# Altium PCB Barun Gas Control V2a.PcbDoc
Units mil, origin at the board's own origin, x right, y up, seen from the top; angles counter-clockwise.
Board outline 3937.01 x 2165.35 mil, 2 copper layers (Top Layer, Bottom Layer); 36 components, 30 nets, 123 pads, 0 vias.
Unrouted connection lines stored in the file: 1.
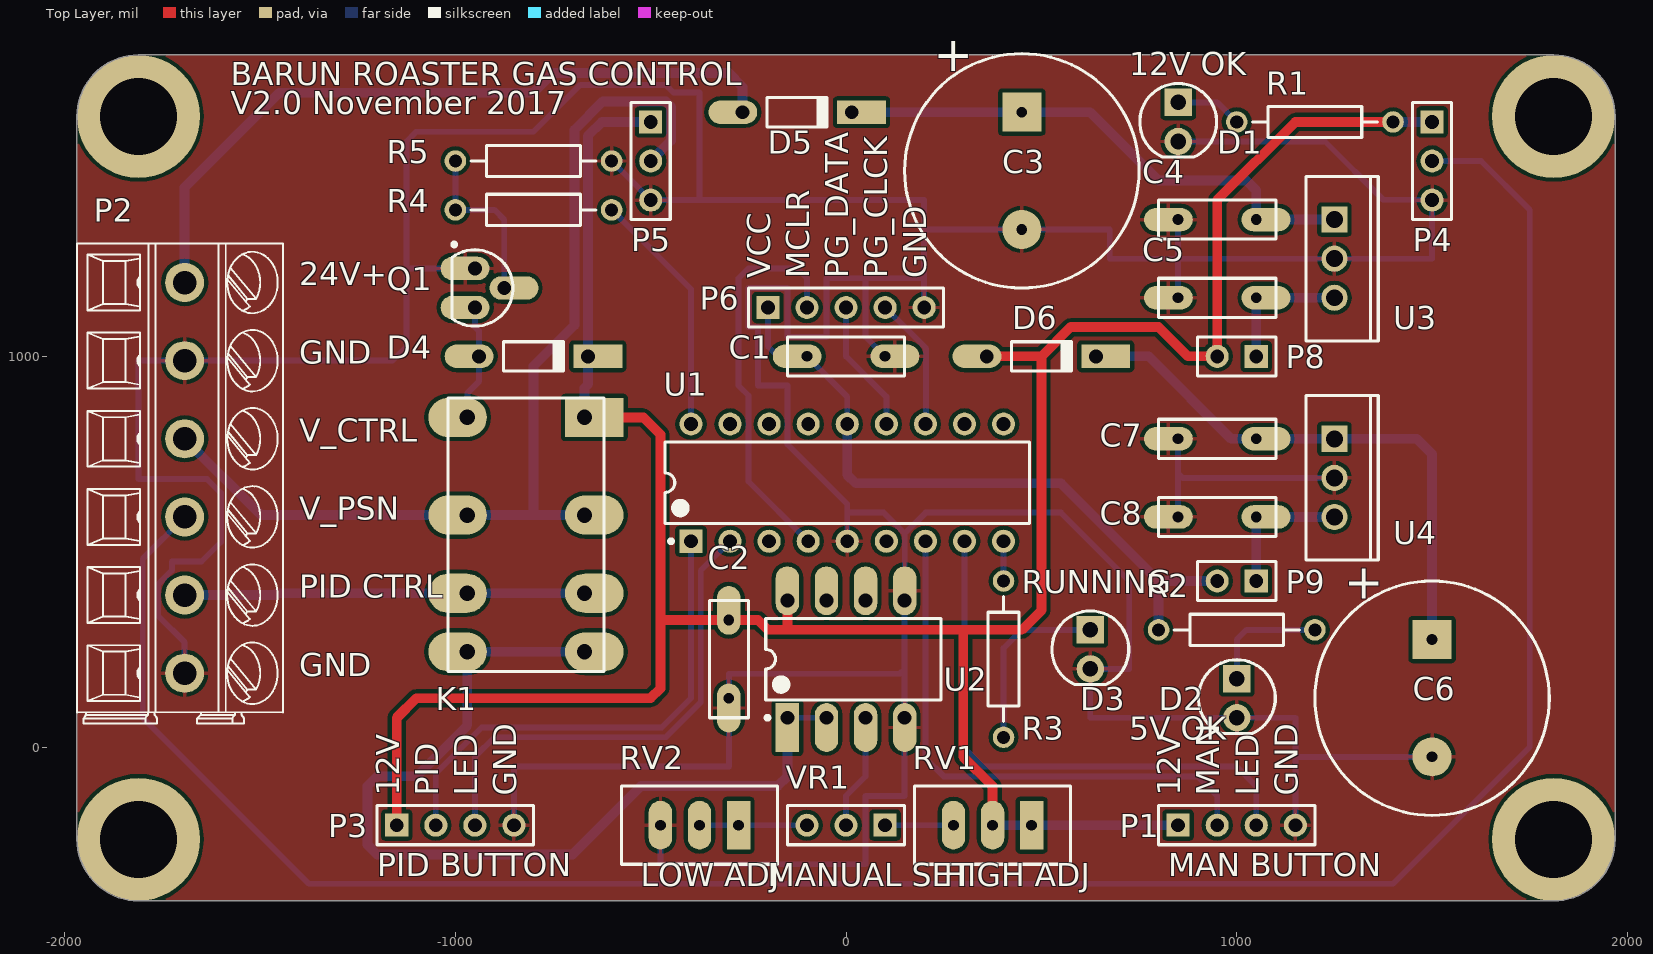
[diagram p0: Top Layer view]
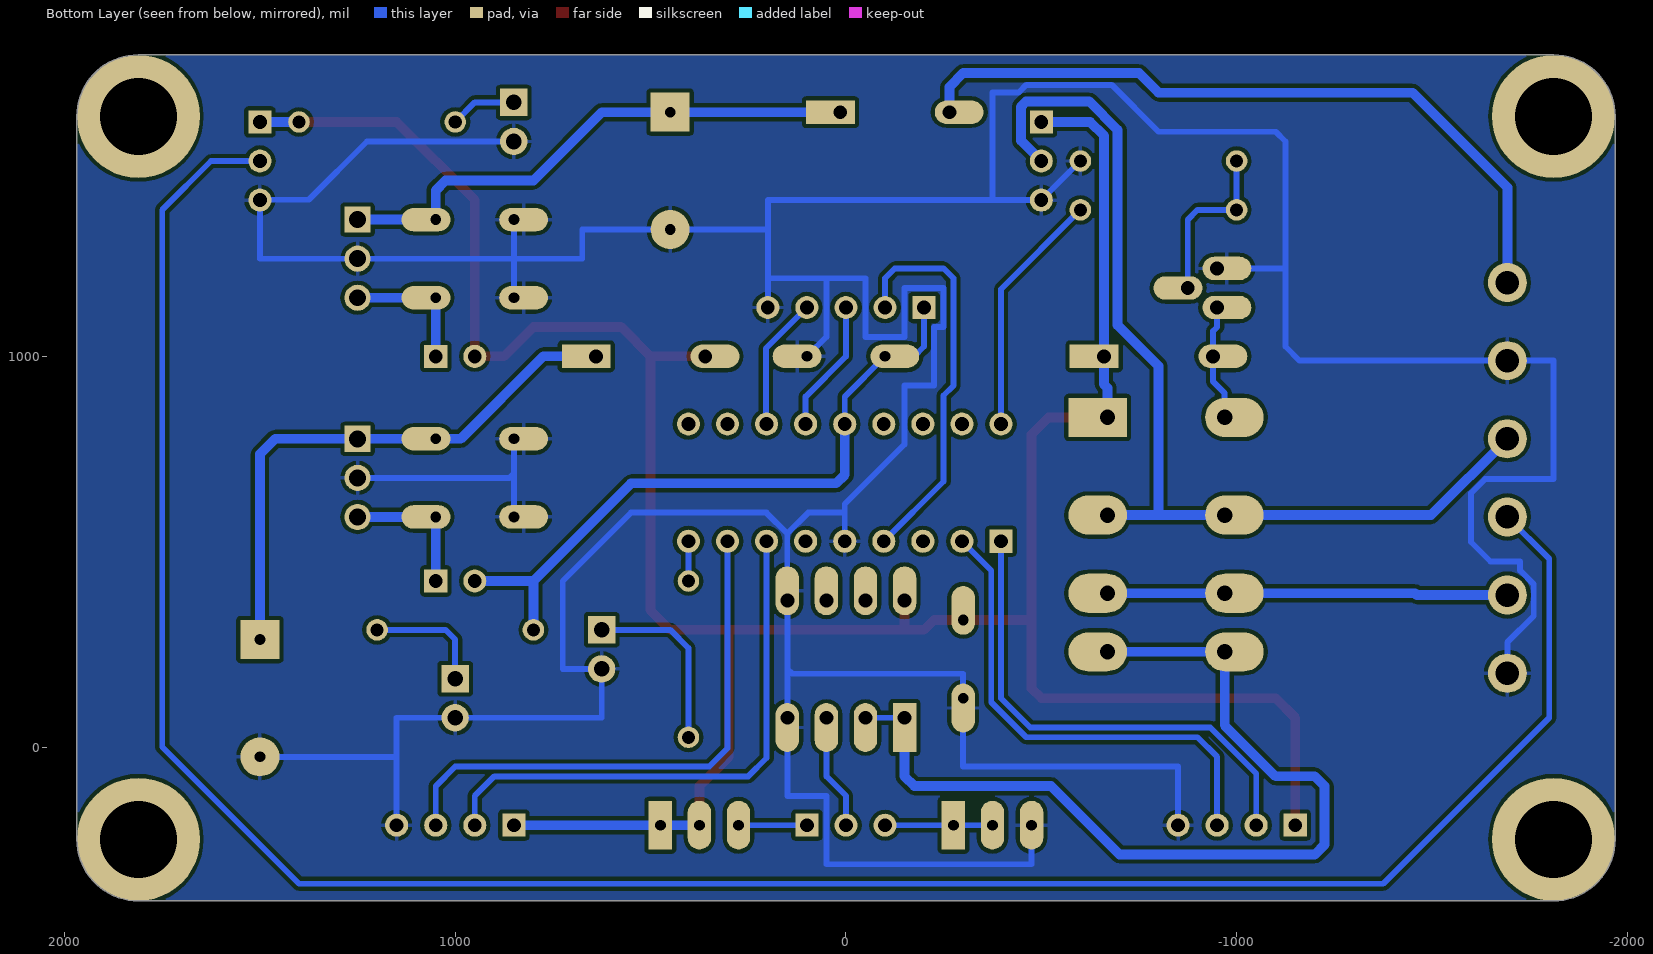
[diagram p1: Bottom Layer view, seen from below]

## Layer stack, top to bottom
Top Solder: solder mask 0.4, Solder Resist, Dk 3.5
Top Layer: signal copper 1.4
Dielectric 1: dielectric 12.6, FR-4, Dk 4.8
Bottom Layer: signal copper 1.4
Bottom Solder: solder mask 0.4, Solder Resist, Dk 3.5

## Board outline
-1811.02,-393.7 cw(c-1811.02,-236.22) -1968.5,-236.22 -1968.5,1614.17 cw(c-1811.02,1614.17) -1811.02,1771.65 1811.02,1771.65 cw(c1811.02,1614.17) 1968.5,1614.17 1968.5,-236.22 cw(c1811.02,-236.22) 1811.02,-393.7

## Design rules (kind name [scope] priority, off if disabled: settings)
Clearance [All] p1: gap=10 ignorepadtopadclearanceinfootprint=FALSE except(0: Arc-Hole Track-Hole SMDPad-Hole THPad-Hole Via-Hole Fill-Hole Poly-Hole Region-Hole Text-Hole)
PolygonConnect [All] p1: connectstyle=Relief reliefconductorwidth=10 reliefentries=4 polygonreliefangle="90 Angle" airgapwidth=10
RoutingVias [All] p1: holewidth=12 width=24 viastyle="Through Hole" minholewidth=12 minwidth=24 maxholewidth=28 maxwidth=50
SolderMaskExpansion [All] p1: expansion=4
Width [All] p1: maxlimit=250 minlimit=10 preferedwidth=10
30 further rules are at their usual default settings.

## Classes and differential pairs
component class "Barun Gas Control": C1 C2 D3 D4 K1 P1 P2 P3 P4 P5 P6 Q1 R3 R4 R5 RV1 RV2 U1 U2 VR1
component class psu: C3 C4 C5 C6 C7 C8 D1 D2 D5 D6 P8 P9 R1 R2 U3 U4

## Components (designator, comment, footprint, x,y, rotation, side; value= is the part's Value field where it differs from the comment)
C1 "100nF" "CAP RADIAL 0.200" 0,1000 r180 top
C2 "100nF" "CAP RADIAL 0.200" -300,225 r90 top
C3 "10uF" RB7.6-15 450,1475 r90 top
C4 "100nF" "CAP RADIAL 0.200" 950,1350 r180 top
C5 "100nF" "CAP RADIAL 0.200" 950,1150 r180 top
C6 "10uF" RB7.6-15 1500,125 r90 top
C7 "100nF" "CAP RADIAL 0.200" 950,788.98 r180 top
C8 "100nF" "CAP RADIAL 0.200" 950,588.98 r180 top
D1 "LED (RED)" "LED(3D) 5MM VERTICAL (GREEN)" 850,1600 r90 top
D2 "LED (GREEN)" "LED(3D) 5MM VERTICAL (GREEN)" 1000,125 r90 top
D3 "LED (BLUE)" "LED(3D) 5MM VERTICAL (GREEN)" 625,250 r90 top
D4 "Diode 1N4148" DO-35 -800,1000 r0 top
D5 "1N4007" DO-35 -125,1625 r0 top value=S1M
D6 "1N4007" DO-35 500,1000 r0 top value=S1M
K1 "Relay-DPDT" "RELAY DPDT" -819.29,543.7 r270 top
P1 "Header 4" HDR1X4 850,-200 r0 top
P2 "Header 6" "6 x 5.08mm" -1692.91,688.98 r270 top
P3 "Header 4" HDR1X4 -1150,-200 r0 top
P4 "DUTY_DISPLAY" HDR1X3 1500,1600 r270 top
P5 "SET_DISPLAY" HDR1X3 -500,1600 r270 top
P6 "Header 5" HDR1X5 -200,1125 r0 top
P8 "Header 2" HDR1X2 1050,1000 r180 top
P9 "Header 2" HDR1X2 1050,425 r180 top
Q1 "2N3904" TO-92A -950,1175 r180 top
R1 "Res2" AXIAL-0.4 1200,1600 r180 top value=1K
R2 "Res2" AXIAL-0.4 1000,300 r0 top value=1K
R3 "Res2" AXIAL-0.4 403.15,225 r90 top value=1K
R4 "Res2" AXIAL-0.4 -800,1375 r180 top value=1K
R5 "Res2" AXIAL-0.4 -800,1500 r180 top value=1K
RV1 "10k" TRIMMER 375,-200 r180 top
RV2 "10k" TRIMMER -375,-200 r180 top
U1 "PIC16F648A" DIP-18 3.15,676.77 r90 top value=PIC16F88
U2 "LM392M" DIP_8 0,225 r90 top
U3 "LM7812" TO-220 1250,1250 r270 top
U4 "LM7805" TO-220 1250,688.98 r270 top
VR1 "DUTY" HDR1X3 100,-200 r180 top value=10k

## Footprints (in the part's own frame and the unit in brackets; to place one, negate y for a bottom-side part, rotate by r counter-clockwise, add the part's x,y. Pads: shape width x height; smd on the part's side, far side on the other; paste and mask are expansions set on the pad)
"6 x 5.08mm" [mil] "Phoenix Contact 1733596"
  round 100 hole 60: 1(-500,0) 2(-300,0) 3(-100,0) 4(100,0) 5(300,0) 6(500,0)
  silkscreen extent -600,-276 629,252, body extent -600,-276 629,252, height 602
AXIAL-0.4 [mm] "Axial Device, Thru-Hole; 2 Leads; 0.4 in Pin Spacing"
  round 1.4 hole 0.85: 1(-5.08,0) 2(5.08,0)
  silkscreen extent -4.06,-1.02 4.06,1.02
"CAP RADIAL 0.200" [mil]
  oval 125x60 hole 27.56 copper offset -25,0: 1(-100,0)
  oval 125x60 hole 27.56 copper offset 25,0: 2(100,0)
  silkscreen extent -150,-50 150,50, body extent -110,-49 107,49, height 257
DIP-18 [mm] "DIP; 18 Leads; Row Spacing 7.62 mm; Pitch 2.54 mm"
  rect 1.5x1.5 hole 0.9: 1(-3.81,10.16)
  round 1.5 hole 0.9: 2(-3.81,7.62) 3(-3.81,5.08) 4(-3.81,2.54) 5(-3.81,0) 6(-3.81,-2.54) 7(-3.81,-5.08) 8(-3.81,-7.62) 9(-3.81,-10.16) 10(3.81,-10.16) 11(3.81,-7.62) 12(3.81,-5.08) 13(3.81,-2.54) 14(3.81,0) 15(3.81,2.54) 16(3.81,5.08) 17(3.81,7.62) 18(3.81,10.16)
  silkscreen extent -3.93,-11.85 2.65,11.85, body extent -3.6,-11.8 3.6,11.8, height 5.08
DIP_8 [mil]
  rect 125x60 hole 35.43 copper offset -25,0: 1(-150,150)
  oval 125x60 hole 35.43 copper offset -25,0: 2(-150,50) 3(-150,-50) 4(-150,-150)
  oval 125x60 hole 35.43 copper offset 25,0: 5(150,-150) 6(150,-50) 7(150,50) 8(150,150)
  silkscreen extent -155,-243 104,206, body extent -155,-225 155,225, height 175
DO-35 [mm] "Diode, Axial; Body 3.8 x 1.9 mm (LxDia. max), Lead Dia. 0.53 mm (max)"
  oval 3.175x1.524 hole 0.9 copper offset -0.635,0: 1(-3.55,0)
  rect 3.175x1.524 hole 0.9 copper offset 0.635,0: 2(3.55,0)
  silkscreen extent -1.95,-0.95 2.05,0.95
HDR1X2 [mm] "Connector; Header; 2 Position"
  rect 1.5x1.5 hole 0.9: 1(0,0)
  round 1.5 hole 0.9: 2(2.54,0)
  silkscreen extent -1.27,-1.27 3.81,1.27
HDR1X3 [mm] "Connector; Header; 3 Position"
  rect 1.5x1.5 hole 0.9: 1(0,0)
  round 1.5 hole 0.9: 2(2.54,0) 3(5.08,0)
  silkscreen extent -1.27,-1.27 6.35,1.27
HDR1X4 [mm] "Connector; Header; 4 Position"
  rect 1.5x1.5 hole 0.9: 1(0,0)
  round 1.5 hole 0.9: 2(2.54,0) 3(5.08,0) 4(7.62,0)
  silkscreen extent -1.27,-1.27 8.89,1.27
HDR1X5 [mm] "Connector; Header; 5 Position"
  rect 1.5x1.5 hole 0.9: 1(0,0)
  round 1.5 hole 0.9: 2(2.54,0) 3(5.08,0) 4(7.62,0) 5(10.16,0)
  silkscreen extent -1.27,-1.27 11.43,1.27
"LED(3D) 5MM VERTICAL (GREEN)" [mil]
  rect 70x70 hole 40: 1(50.06,-0.28)
  round 70 hole 40: 2(-49.94,-0.28)
  silkscreen extent -90,-99 98,98, body extent -99,-98 98,98, height 413
RB7.6-15 [mm] "Polarized Capacitor (Radial); 2 Leads"
  rect 2.54x2.54 hole 0.7: 1(3.81,0)
  round 2.54 hole 0.7: 2(-3.81,0)
  silkscreen extent -7.62,-7.62 7.62,7.62
"RELAY DPDT" [mm]
  oval 2.54x3.81 hole 1 copper offset 0,0.635: 1(7.62,3.81) 2(3.81,3.81) 3(-1.27,3.81)
  oval 2.54x3.81 hole 1 copper offset 0,-0.635: 4(7.62,-3.81) 5(3.81,-3.81) 6(-1.27,-3.81) 8(-7.62,-3.81)
  rect 2.54x3.81 hole 1 copper offset 0,0.635: 7(-7.62,3.81)
  silkscreen extent -8.89,-5.08 8.89,5.08
TO-92A [mil] "TO, Flat Index; 3 In-Line, Axial Leads; Body Dia. 4.5mm; Leads 0.51 x 0.48 mm (max)"
  oval 125x60 hole 35.43 copper offset 25,0: 1(0,-50) 3(0,50)
  oval 125x60 hole 35.43 copper offset -25,0: 2(-75,0)
  silkscreen extent -98,-116 59,98, body extent -98,-98 59,98, height 270
TO-220 [mm] "TO-220"
  rect 1.7x1.7 hole 1.1: 1(-2.54,0)
  round 1.7 hole 1.1: 2(0,0) 3(2.54,0)
  silkscreen extent -5.35,-1.85 5.35,2.85, body extent -5.35,-2.15 5.35,2.85, height 20.6
TRIMMER [mil] "Thru-Hole; 3 Leads"
  rect 60x125 hole 27.56: 1(-100,0)
  oval 60x125 hole 27.56: 2(0,0) 3(100,0)
  silkscreen extent -200,-100 200,100, body extent -188,-95 188,95, height 455

## Part data
C1 C2: library part CAP, "CAPACITOR SMD 0402", Supplier Part Number 1=810-CGJ3E2X7R1H104K, Supplier 1=Mouser
C3 C6: library part "Cap Pol", "CAPACITOR POLARISED TAG B CASE", Manufacturer=Vishay/Sprague, Manufacturer Part No.=591D106X9020B2T15H, Mouser Part no.=71-591D106X9020B2T15, Web link=http://au.mouser.com/ProductDetail/Vishay-Sprague/591D106X9020B2T15H/?qs=sGAEpiMZZMuEN2agSAc2pvHIaWFtjSV0lDKOXo3DDxQ%3d
C4 C5 C7 C8: library part CAP, "CAPACITOR SMD 0603", Manufacturer=Murata, Manufacturer Part No.=GCM188R71C104KA37D, Mouser Part no.=81-GCM188R71C104KA7D, Web link=http://au.mouser.com/ProductDetail/Murata/GCM188R71C104KA37D/?qs=aEuGZpxfbxWKAxwYn%252beTMg%3d%3d
D1 D2 D3: library part "LED 3mm RED", "3mm RED LED", Farnell Part no.=1003393, Manufacturer=Kingbright, Manufacturer Part No.=WP132XIT, Mouser Part no.=604-WP132XIT, Web link=http://au.mouser.com/Search/Refine.aspx?Keyword=604-WP132XIT
D4: "High Conductance Fast Diode", Code_JEDEC=DO-204-AH, ComponentLink1Description="Manufacturer Link", ComponentLink1URL=http://www.fairchildsemi.com/, ComponentLink2Description=Datasheet, ComponentLink2URL=http://www.fairchildsemi.com/ds/1N%2F1N4148.pdf, DatasheetVersion=1997, LatestRevisionDate=17-Jul-2002, LatestRevisionNote="Re-released for DXP Platform.", PackageDescription="Diode, Axial; Body 3.8 x 1.9 mm (LxDia. max), Lead Dia. 0.53 mm (max)", PackageReference=DO-35, Published=8-Jun-2000, Publisher="Altium Limited"
D5 D6: library part DIODE, "DIODE, POWER", Manufacturer="TAIWAN SEMI", Manufacturer Part No.=S1M, Mouser Part no.=821-S1M, Web link=http://au.mouser.com/ProductDetail/Taiwan-Semiconductor/S1M/?qs=sGAEpiMZZMtEwUVCuofpuOlSmRjzJonf%252bmrIm0%252bGbjE%3d
K1: "DS2Y-S-DC12V", Manufacturer="Generic Components", Manufacturer Part No.=DS2Y-S-DC12V, Revision="July-2002: Re-released for DXP Platform.", Web link=http://www.forward-relays.com/doce/products/product_detail.asp?catalogid=&productid=93
P1 P3: "Header, 4-Pin", LatestRevisionDate=17-Jul-2002, LatestRevisionNote="Re-released for DXP Platform.", Publisher="Altium Limited"
P2: "Header, 6-Pin", LatestRevisionDate=17-Jul-2002, LatestRevisionNote="Re-released for DXP Platform.", Publisher="Altium Limited"
P4 P5: library part "Header 3", "Header, 3-Pin", LatestRevisionDate=17-Jul-2002, LatestRevisionNote="Re-released for DXP Platform.", Publisher="Altium Limited"
P6: "Header, 5-Pin", LatestRevisionDate=17-Jul-2002, LatestRevisionNote="Re-released for DXP Platform.", Publisher="Altium Limited"
P8 P9: "Header, 2-Pin", LatestRevisionDate=17-Jul-2002, LatestRevisionNote="Re-released for DXP Platform.", Publisher="Altium Limited"
Q1: "NPN General Purpose Amplifier", ComponentLink1Description="Manufacturer Link", ComponentLink1URL=http://www.fairchildsemi.com/, ComponentLink2Description=Datasheet, ComponentLink2URL=http://www.fairchildsemi.com/ds/2N%2F2N3904.pdf, DatasheetVersion=1997, LatestRevisionDate=15-Jan-2003, LatestRevisionNote="PCB Footprint 'BCY-W3/D4.7' replaced", PackageDescription="TO, Flat Index; 3 In-Line, Axial Leads; Body Dia. 4.5mm; Leads 0.51 x 0.48 mm (max)", PackageReference=TO-92A, PackageVersion=Sep-1998, Published=8-Jun-2000, Publisher="Altium Limited"
R1 R2 R3 R4 R5: "Resistor", LatestRevisionDate=17-Jul-2002, LatestRevisionNote="Re-released for DXP Platform.", PackageDescription="Axial Device, Thru-Hole; 2 Leads; 0.4 in Pin Spacing", PackageReference=AXIAL-0.4, Published=8-Jun-2000, Publisher="Altium Limited"
RV1 RV2: library part "VAR (POT) SMD", "Variable Resistor", Series=PVZ3A
U1: library part PIC16F87/88, "PIC16F88", Farnell Part no.=9761519, Manufacturer="Microchip Technology", Manufacturer Part No.=PIC16F88-E/SS, Mouser Part no.=579-PIC16F88-E/SS, Web link=http://au.mouser.com/ProductDetail/Microchip-Technology/PIC16F88-E-SS/?qs=sGAEpiMZZMvu0Nwh4cA1waDrdroEY0RCb%252bRi%252b4Dz0K0%3d
U2: "Low Power Operational Amplifier/Voltage Comparator, 8-pin Narrow SOIC", Manufacturer="National Semiconductor", PackageTopMarking=NSZXTT*LM392*M, PowerWise=N, Supplier Part Number 1=LM392M-ND, Code_IPC=SOIC127P600-8, Code_JEDEC=MS-012-AA, ComponentLink1Description="LM392 Datasheet", ComponentLink1URL=http://www.national.com/ds/LM/LM392.pdf, ComponentLink2Description="LM392 Web Page", ComponentLink2URL=http://www.national.com/pf/LM/LM392.html, ComponentLink3Description="M08A Package Page", ComponentLink3URL=http://www.national.com/packaging/folders/m08a.html, CompType=Amplifiers, DatasheetVersion=Aug-2000, LatestRevisionDate=13-Jan-2009, LatestRevisionNote="Sim Model Added.", PackageDescription="SOIC Narrow, 4.9 x 3.9 x 1.45mm, 8 Lead, 1.27mm Pitch", PackageReference=M08A, PackageVersion="revM, May-2009", PartNumber=LM392M, PinCount=8, Published=4-Dec-2008, Publisher="Altium Limited", RoHS=N, Supplier 1=Digi-Key, Supplier 2=Farnell, Supplier Part Number 2=9486755
U3: library part MC7805ACT, "3-Terminal Positive Fixed Voltage Regulator", Manufacturer="Fairchild Semiconductor", Manufacturer Part No.=LM7812, Web link=http://au.mouser.com/ProductDetail/Fairchild-Semiconductor/LM7805CT/?qs=sGAEpiMZZMtUqDgmOWBjgPJMQlYvsHAW%252bBbwCYnQla0%3d
U4: library part MC7805ACT, "3-Terminal Positive Fixed Voltage Regulator", Manufacturer="Fairchild Semiconductor", Manufacturer Part No.=LM7805CT, Mouser Part no.=512-LM7805CT, Web link=http://au.mouser.com/ProductDetail/Fairchild-Semiconductor/LM7805CT/?qs=sGAEpiMZZMtUqDgmOWBjgPJMQlYvsHAW%252bBbwCYnQla0%3d
VR1: library part RPot, "Potentiometer", LatestRevisionDate=17-Jul-2002, LatestRevisionNote="Re-released for DXP Platform.", PackageDescription="Variable Resistor, Thru-Hole; 3 Leads", PackageReference=VR5, Published=8-Jun-2000, Publisher="Altium Limited", Set Position=0.5, Sim Note="Enter the Resistance value and the set point into parameter fields."

## Free pads (board coordinates)
  round 314.96 hole 196.85: MOUNT(-1811.02,-236.22) MOUNT(-1811.02,1614.17) MOUNT(1811.02,-236.22) MOUNT(1811.02,1614.17)

## Nets (pads, with @x,y where several pads share a name; then routed paths per layer and width w, separated by ;. In a path a pad name is that pad's centre, name@x,y a point inside that pad or via, vN(x,y) a via of type N, cw(c..) or ccw(c..) an arc to the next point about the centre after c; other vN are vias at no path point)
12V: C2.2 D4.2 D6.1 K1.7 P1.1 P3.1 P4.1 P5.1 P8.2 R1.1 RV1.1 RV1.2 U2.8 | length 7165
  Top Layer w25: P3.1 -1150,75 -1100,125 -500,125 -475,150 -475,325 ; K1.7 -518.7,843.7 -475,800 -475,325 ; U2.8 -150,300 ; D6.1 500,1000 ; RV1.2 375,-100 300,-25 300,300 ; R1.1 1150,1600 950,1400 P8.2 875,1000 800,1075 575,1075 500,1000 ; -475,325 C2.2 -225,325 -200,300 -150,300 ; -150,300 300,300 ; 300,300 450,300 500,350 500,1000
  Bottom Layer w25: K1.7 -669.29,919.29 -660.24,928.35 D4.2 -660.24,1564.76 -625,1600 P5.1 ; RV1.2 RV1.1 P1.1 ; R1.1 P4.1
24V: C3.1 C4.1 D5.2 U3.1 | length 1393.1
  Bottom Layer w25: D5.2 C3.1 625,1625 800,1450 1025,1450 1050,1425 C4.1 U3.1
\MCLR: P6.2 U1.4 | length 1017.7
  Bottom Layer w15: P6.2 -100,1200 -125,1225 -250,1225 -275,1200 -275,925 -249.82,899.82 -249.82,679.74 U1.4
GND: C1.1 C2.1 C3.2 C4.2 C5.2 C6.2 C7.2 C8.2 D1.2 D2.2 D3.2 P1.4 P2.2 P2.6 P3.4 P4.3 P5.3 P6.5 Q1.1 R5.1 RV2.3 U1.5 U2.4 U2.5 U3.2 U4.2 | length 14941.2
  Bottom Layer w15: P2.6 -1692.91,267.91 -1760.41,335.41 -1760.41,416.94 -1725,452.35 -1725,475 -1650,475 -1600,525 -1600,650 -1636.02,686.02 -1811.02,686.02 -1811.02,988.98 P2.2 -1161.02,988.98 -1125,1025 -1125,1225 ; Q1.1 -1125,1225 ; P3.4 -850,-50 -300,-50 C2.1 -300,187.5 137.5,187.5 150,200 ; R5.1 P5.3 -375,1400 ; RV2.3 -475,-300 50,-300 50,-125 150,-125 U2.4 150,200 ; U1.5 3.15,600 ; C1.1 50,1050 50,1200 ; P6.5 200,1200 ; C8.2 850,700 ; C7.2 850,700 ; C5.2 850,1250 ; C4.2 850,1250 ; D1.2 1225.9,1550.06 1375,1400.96 1500,1400.96 P4.3 1500,1250 U3.2 850,1250 ; P1.4 1150,-25 ; U4.2 861.02,688.98 850,700 ; C6.2 1150,-25 ; -1125,1225 -1125,1550 -1100,1575 -800,1575 -680,1695 -461.7,1695 -441.7,1675 -375,1675 -375,1400 ; -375,1400 200,1400 200,1325 ; 3.15,600 3.15,621.85 -149.82,774.82 -149.82,846.43 -150,846.61 -150,925 -225,925 -225,1075 -250,1075 -250,1175 -150,1175 -150,1050 -50,1050 -50,1200 50,1200 ; 3.15,600 96.61,600 150.18,546.43 ; 50,1200 200,1200 ; 150,200 U2.5 150.18,375.18 150.18,546.43 ; 150.18,546.43 203.75,600 550,600 725,425 725,200 625.34,200 D3.2 625,199.78 625,75 1000.22,75 D2.2 1000.34,75 1150,75 1150,-25 ; 200,1200 200,1325 ; 200,1325 C3.2 675,1325 675,1250 850,1250
M\A\N\/PID: R4.1 U1.18 | length 632.4
  Bottom Layer w15: R4.1 -396.85,1171.85 U1.18
MANUAL: P1.2 U1.7 | length 1416.9
  Bottom Layer w15: U1.7 203.15,-28.15 250,-75 900,-75 950,-125 P1.2
MANUAL_CONTROL: K1.1 K1.4 U2.1 U2.2 | length 2376.4
  Bottom Layer w15: U2.1 U2.2
  Bottom Layer w25: K1.1 K1.4 -969.29,55.71 -1100,-75 -1200,-75 -1225,-100 -1225,-250 -1200,-275 -700,-275 -525,-100 -175,-100 -150,-75 U2.1
MANUAL_LED: P1.3 U1.8 | length 1416.9
  Bottom Layer w15: U1.8 303.15,-3.15 350,-50 1000,-50 1050,-100 P1.3
MANUAL_SET: U2.3 VR1.2 | length 295.7
  Bottom Layer w15: VR1.2 0,-125 50,-75 U2.3
NetC5_1: C5.1 P8.1 U3.3 | length 350
  Bottom Layer w25: P8.1 C5.1 U3.3
NetC6_1: C6.1 C7.1 D6.2 U4.1 | length 1438.8
  Bottom Layer w25: D6.2 775,1000 986.02,788.98 C7.1 U4.1 1461.02,788.98 1500,750 C6.1
NetC8_1: C8.1 P9.1 U4.3 | length 364
  Bottom Layer w25: P9.1 C8.1 U4.3
NetD1_1: D1.1 R1.2 | length 170.5
  Bottom Layer w15: D1.1 949.94,1650.06 R1.2
NetD2_1: D2.1 R2.2 | length 310.2
  Bottom Layer w15: D2.1 1000.28,275.28 1025,300 R2.2
NetD3_1: D3.1 R3.1 | length 470.1
  Bottom Layer w15: R3.1 403.15,253.15 450.06,300.06 D3.1 D3.1@625,300.34
NetD4_1: D4.1 K1.8 Q1.3 | length 297.8
  Bottom Layer w15: K1.8 -969.29,905.71 -939.76,935.24 D4.1 -939.76,1064.76 -950,1075 Q1.3
NetQ1_2: Q1.2 R4.2 R5.2 | length 435.4
  Bottom Layer w15: R5.2 R4.2 -900,1375 -875,1350 Q1.2
NetRV1_3: RV1.3 VR1.1 | length 175
  Bottom Layer w15: VR1.1 RV1.3
NetRV2_1: RV2.1 RV2.2 VR1.3 | length 275
  Bottom Layer w15: RV2.2 RV2.1 VR1.3
NetU2_6: U2.6 U2.7
PG_CLCK: P6.4 U1.12 | length 342.5
  Bottom Layer w15: P6.4 205,1020 205,828.62 U1.12
PG_DATA: P6.3 U1.13 | length 341
  Bottom Layer w15: P6.3 0,1000 103.15,896.85 U1.13
PID: P3.2 U1.1 | length 1267.2
  Bottom Layer w15: P3.2 -1050,-67.43 -932.57,50 -471.85,50 -396.85,125 U1.1
PID_CONTROL: K1.2 K1.5 P2.5 | length 995.7
  Bottom Layer w25: P2.5 -1461.02,388.98 -1456.3,393.7 K1.5@-999.21,393.7 ; K1.5 K1.2
PID_LED: P3.3 U1.2 | length 1254.2
  Bottom Layer w15: P3.3 -950,-25 -900,25 -461.5,25 -371.85,114.64 -371.85,451.77 U1.2
STATUS_0: R3.2 U1.9 | length 101.8
  Bottom Layer w15: R3.2 U1.9
VALVE_CONTROL: K1.3 K1.6 P2.3 P5.2 | length 2577
  Bottom Layer w25: P2.3 -1497.64,593.7 K1.6 -800,593.7 ; K1.3 -800,593.7 ; P5.2 -447.97,1552.03 -447.97,1638.85 -461.15,1652.03 -622.97,1652.03 -695.24,1579.76 -695.24,1079.76 -800,975 -800,593.7
VALVE_POSITION: P2.4 P4.2 | length 6106.1
  Bottom Layer w15: P2.4 -1800,481.89 -1800,75 -1375,-350 1400,-350 1750,0 1750,1375 1625,1500 P4.2
VCC: C1.2 P6.1 P9.2 R2.1 U1.14 | length 1740.7
  Bottom Layer w15: P6.1 -200,1025 -175,1000 C1.2 3.15,896.85 U1.14
  Bottom Layer w25: U1.14 3.15,696.85 25,675 550,675 800,425 ; R2.1 800,425 ; P9.2 800,425
VIN: D5.1 P2.1 | length 1871.9
  Bottom Layer w25: P2.1 -1692.91,1432.09 -1450,1675 -800,1675 -750,1725 -300,1725 -264.76,1689.76 D5.1
pads on no net: U1.3 U1.6 U1.10 U1.11 U1.15 U1.16 U1.17

## Polygon pours and split planes (outlines as drawn)
GND on Top Layer "Top Layer GND" (solid, remove dead copper, pour order 0): -1811.02,-393.7 cw(c-1811.02,-236.22) -1968.5,-236.22 -1968.5,1614.17 cw(c-1811.02,1614.17) -1811.02,1771.65 1811.02,1771.65 cw(c1811.02,1614.17) 1968.5,1614.17 1968.5,-236.22 cw(c1811.02,-236.22) 1811.02,-393.7
GND on Bottom Layer "BOTTOM GND" (solid, remove dead copper, pour order 1): -1811.02,-393.7 cw(c-1811.02,-236.22) -1968.5,-236.22 -1968.5,1614.17 cw(c-1811.02,1614.17) -1811.02,1771.65 1811.02,1771.65 cw(c1811.02,1614.17) 1968.5,1614.17 1968.5,-236.22 cw(c1811.02,-236.22) 1811.02,-393.7

## Silkscreen, mask and mechanical layers (free items; w line width, h text height)
Top Overlay:
  text "+" at 225,1700 h150
  text "12V OK" at 725,1700 h100
  text "BARUN ROASTER GAS CONTROL" at -1575,1675 h100
  text "V2.0 November 2017" at -1575,1600 h100
  text "VCC" at -175,1200 h100 r90
  text "MCLR" at -75,1200 h100 r90
  text "PG_DATA" at 25,1200 h100 r90
  text "PG_CLCK" at 125,1200 h100 r90
  text "GND" at 225,1200 h100 r90
  text "24V+" at -1400,1162.52 h100
  text "GND" at -1400,962.52 h100
  text "V_CTRL" at -1400,762.52 h100
  text "V_PSN" at -1400,562.52 h100
  text "RUNNING" at 450,375 h100
  text "PID CTRL" at -1400,362.52 h100
  text "+" at 1275,350 h150
  text "GND" at -1400,162.52 h100
  text "5V OK" at 725,0 h100
  text "12V" at -1125,-125 h100 r90
  text "PID" at -1025,-125 h100 r90
  text "LED" at -925,-125 h100 r90
  text "GND" at -825,-125 h100 r90
  text "12V" at 875,-125 h100 r90
  text "MAN" at 975,-125 h100 r90
  text "LED" at 1075,-125 h100 r90
  text "GND" at 1175,-125 h100 r90
  text "PID BUTTON" at -1200,-350 h100
  text "MAN BUTTON" at 825,-350 h100
  text "LOW ADJ" at -525,-375 h100
  text "MANUAL SET" at -200,-375 h100
  text "HIGH ADJ" at 250,-375 h100
Mechanical 1:
  lines w4.92: -1968.5,-236.22 -1968.5,1614.17 ; -1811.02,-393.7 1811.02,-393.7 ; -1811.02,1771.65 0,1771.65 1811.02,1771.65 ; 1968.5,-236.22 1968.5,1614.17
  lines w5: -1968.5,-236.22 ccw(c-1811.02,-236.22) -1811.02,-393.7 ; -1968.5,1614.17 cw(c-1811.02,1614.17) -1811.02,1771.65 ; 1811.02,-393.7 ccw(c1811.02,-236.22) 1968.5,-236.22 ; 1811.02,1771.65 cw(c1811.02,1614.17) 1968.5,1614.17
Mechanical 4:
  drawing of 2460 lines, arcs and shapes, not listed